# EAGLE board carret (EAGLE 5.11)
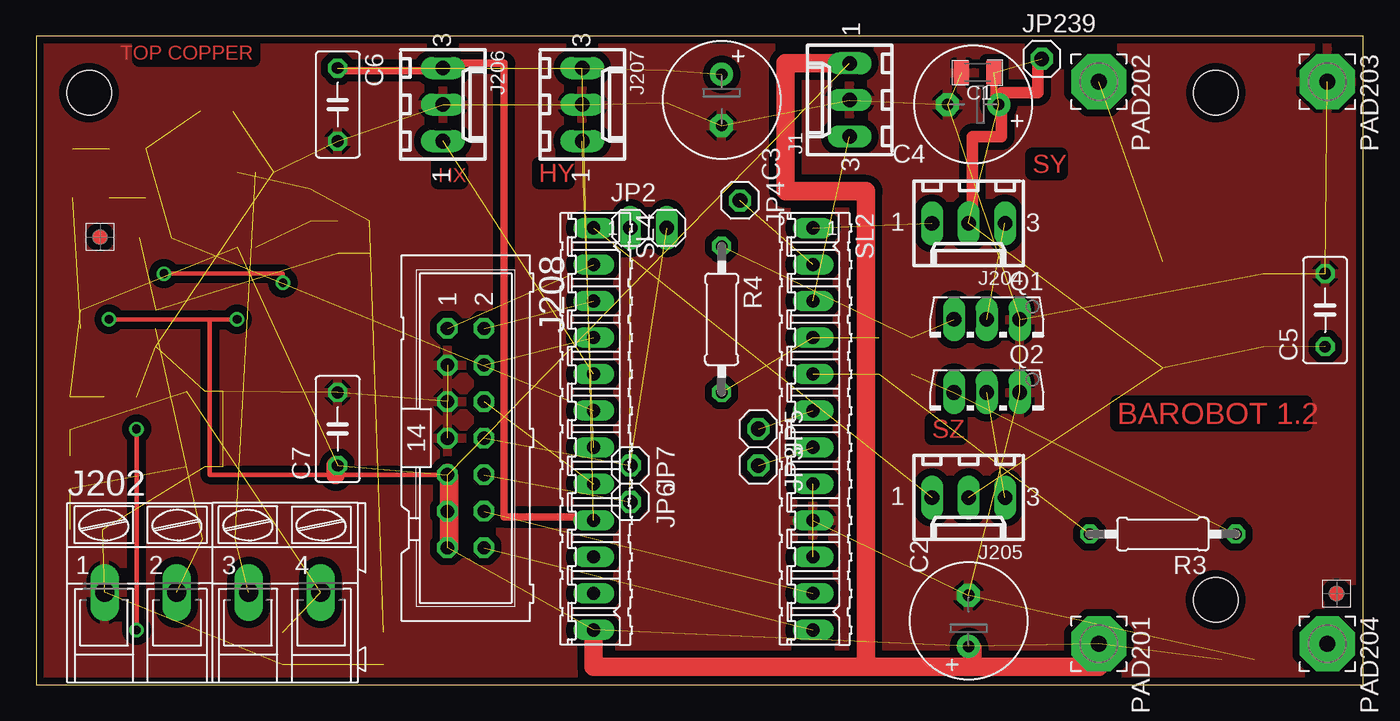
[diagram p0: board, top side]
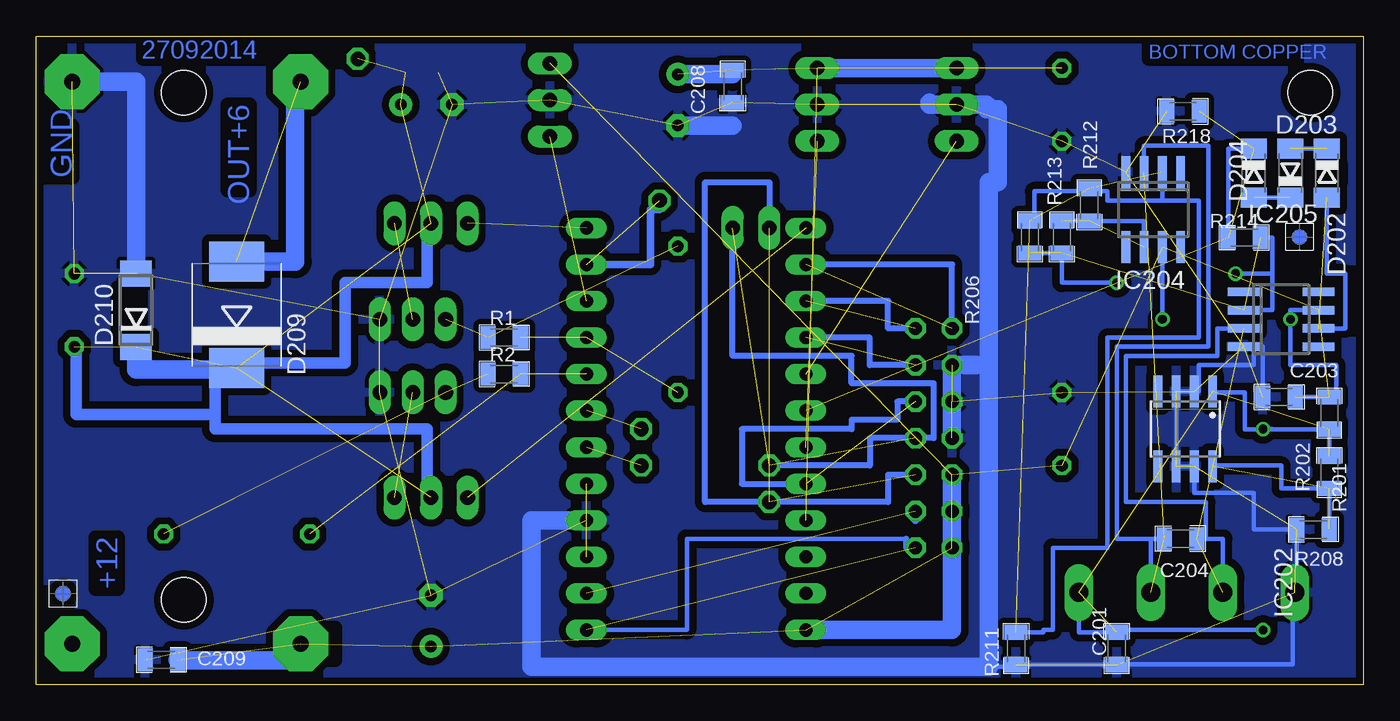
[diagram p1: board, bottom side, seen from below]

Size 92.2 x 45.09 mm. Coordinates in mm from the lower left corner, seen from the top.
Outline: 0,0 92.2,0 92.2,45.09 0,45.09 0,0
Copper layers (1*16): Top 0.035mm / dielectric 1.5mm / Bottom 0.035mm
Design rules "default *": minimum track width 10mil, minimum drill 0.5mm, track to track 10mil, track to pad 10mil, pad to pad 8mil, via to via 10mil, smd to smd 8mil, copper to edge 20mil, drill to drill 8mil, minimum pad ring 10mil, minimum via ring 8mil, stop-mask expansion 0mil, vias tented up to drill 0mil, thermal gap 10mil
Net classes: 0 default: width 0.381 mm, drill 0.254 mm, clearance 0.254 mm; 1 power12: width 1.27 mm; 2 ground: width 0.508 mm; 3 power5: width 0.508 mm; 4 power6: width 0.813 mm
Holes 3.1 mm at 81.93,5.91 81.95,41.15 3.68,41.15
bRestrict: area 84.9,24.8 to 86.5,27.6; area 1.6,34.9 to 8.6,36.2; area 71.4,1.7 to 71.6,4

## Footprints (pad centres in the part's own frame; a part is rotated, then mirrored left to right if it is on the bottom)
0805 = smd 1.044 x 1.6: 1 -1.127,0; 2 1.127,0
E3,5-8 = drill 0.813 pad 1.6 round: + -1.778,0 | drill 0.813 pad 1.6 octagon: - 1.778,0
C050-030X075 = drill 0.813 octagon: 1 -2.54,0; 2 2.54,0
SOD80C = smd 1.4 x 1.8: A 1.7,0; C -1.7,0
SMC = smd 2.8 x 3.8: A 3.7,0; C -3.7,0
DO214AA = smd 1.8 x 2.2: A 2.55,0; C -2.55,0
SO08 = smd 0.6 x 2.2: 1 -1.905,-2.6; 2 -0.635,-2.6; 3 0.635,-2.6; 4 1.905,-2.6; 5 1.905,2.6; 6 0.635,2.6; 7 -0.635,2.6; 8 -1.905,2.6
6410-03 = drill 1.016 long: 1 2.54,0; 2 0,0; 3 -2.54,0
AK300/4 = drill 1.321 long: 1 -7.493,0; 2 -2.515,0; 3 2.515,0; 4 7.493,0
ML14 = drill 0.914 octagon: 1 -7.62,-1.27; 2 -7.62,1.27; 3 -5.08,-1.27; 4 -5.08,1.27; 5 -2.54,-1.27; 6 -2.54,1.27; 7 0,-1.27; 8 0,1.27; 9 2.54,-1.27; 10 2.54,1.27; 11 5.08,-1.27; 12 5.08,1.27; 13 7.62,-1.27; 14 7.62,1.27
1X02 = drill 1.016 long: 1 -1.27,0; 2 1.27,0
1X01 = drill 1.016 octagon: 1 0,0
3,81/1,1 = drill 1.118 pad 3.81 octagon: 1 0,0
TO126AV = drill 1.016 long: B 2.286,-1.27; C 0,-1.27; E -2.286,-1.27
0207/10 = drill 0.813 octagon: 1 -5.08,0; 2 5.08,0
12P = drill 0.914 long: 1 -13.97,0; 2 -11.43,0; 3 -8.89,0; 4 -6.35,0; 5 -3.81,0; 6 -1.27,0; 7 1.27,0; 8 3.81,0; 9 6.35,0; 10 8.89,0; 11 11.43,0; 12 13.97,0

## Placement (x,y rotation side)
C1  100n  [0805]  65.41,42.55 180 top
C2  100uF  [E3,5-8]  64.77,4.45 90 top
C3  100uF  [E3,5-8]  47.62,40.64 270 top
C4  100uF  [E3,5-8]  65.09,40.32 180 top
C5  100n  [C050-030X075]  89.53,26.04 90 top
C6  100n  [C050-030X075]  20.95,40.32 270 top
C7  100n  [C050-030X075]  20.95,17.78 90 top
C201  100n  [0805]  17.14,2.54 90 bottom
C203  100n  [0805]  5.87,20 0 bottom
C204  100n  [0805]  12.7,10.16 180 bottom
C208  100n  [0805]  43.81,41.59 270 bottom
C209  100n  [0805]  83.5,1.75 0 bottom
D202  1N4148  [SOD80C]  2.54,35.56 270 bottom
D203  1N4148  [SOD80C]  5.08,35.56 90 bottom
D204  1N4148  [SOD80C]  7.62,35.56 270 bottom
D209  SK36  [SMC]  78.26,25.72 90 bottom
D210  SS20  [DO214AA]  85.25,26.04 90 bottom
IC202  TL431  [SO08]  12.38,17.78 180 bottom
IC204  OP07  [SO08]  14.61,33.02 180 bottom
IC205  OP07  [SO08]  5.71,25.4 270 bottom
J1  WF03S-LF  [6410-03]  56.52,40.64 90 top
J202  [AK300/4]  12.27,6.42 0 top
J204  WF03S-LF  [6410-03]  64.77,32.07 180 top
J205  WF03S-LF  [6410-03]  64.77,13.02 180 top
J206  WF03S-LF  [6410-03]  28.26,40.32 270 top
J207  WF03S-LF  [6410-03]  37.94,40.32 270 top
J208  BH14S  [ML14]  29.84,17.14 270 top
JP2  [1X02]  42.55,31.75 0 top
JP3  [1X01]  50.16,15.24 270 top
JP4  [1X01]  48.9,33.66 270 top
JP5  [1X01]  50.16,17.78 270 top
JP6  [1X01]  41.27,12.7 270 top
JP7  [1X01]  41.27,15.24 270 top
JP239  [1X01]  69.85,43.5 0 top
PAD201  [3,81/1,1]  73.82,2.86 270 top
PAD202  [3,81/1,1]  73.82,41.91 270 top
PAD203  [3,81/1,1]  89.69,41.91 270 top
PAD204  [3,81/1,1]  89.69,2.86 270 top
Q1  BD679  [TO126AV]  66.04,24.13 180 top
Q2  BD679  [TO126AV]  66.04,19.05 180 top
R1  1k  [0805]  59.69,24.13 0 bottom
R2  1k  [0805]  59.69,21.59 0 bottom
R3  1k  [0207/10]  78.26,10.48 180 top
R4  1k  [0207/10]  47.62,25.4 270 top
R201  82R  [0805]  2.38,18.89 90 bottom
R202  3k 1%  [0805]  2.38,14.76 90 bottom
R206  8k2  [0805]  23.18,31.11 270 bottom
R208  1k 1%  [0805]  3.49,10.79 0 bottom
R211  330k 1%  [0805]  24.13,2.54 90 bottom
R212  1k 1%  [0805]  19.05,33.34 270 bottom
R213  1k 1%  [0805]  20.95,31.11 270 bottom
R214  330k 1%  [0805]  8.28,31.08 180 bottom
R218  470R  [0805]  12.54,39.85 180 bottom
SL2  [12P]  53.98,17.78 270 top
SL4  [12P]  38.73,17.78 270 top
U$1  [FIDUCIAL_G10S]  4.45,31.11 0 top
U$2  [FIDUCIAL_G10S]  90.33,6.35 0 top
U$3  [FIDUCIAL_G10S]  90.33,6.35 0 bottom
U$4  [FIDUCIAL_G10S]  4.45,31.11 0 bottom

## Library data of the parts
C1 C201 C203 C204 C208 C209 R1 R2 R202 R206 R208 R211-R214 R218 = barobot
C2-C4 R3 R4 = rcl
C5-C7 = resistor
D202-D204 D209 D210 = diode
IC202 = 0alib
IC204 IC205 = linear
J1 J204-J207 = con-molex; OC_FARNELL: unknown; OC_NEWARK: unknown
J202 = con-ptr500
J208 = con-ml
JP2-JP7 JP239 = pinhead
PAD201-PAD204 = wirepad
Q1 Q2 = transistor-power
R201 = barobot; A: a
SL2 SL4 = con-amp-quick; OC_FARNELL: unknown; OC_NEWARK: unknown
U$1-U$4 = dicons

## Nets
+10V: C201.2 IC202.1 J202.4 R201.1 R202.2
+12V [power12]: C2.+ C7.1 C203.2 C209.2 IC204.7 IC205.7 J1.1 J208.9 J208.11 J208.13 PAD201.1 R201.2 SL4.12
GND [ground]: C1.2 C2.- C3.- C4.- C5.2 C6.2 C7.2 C201.1 C203.1 C208.2 C209.1 D210.A IC202.2 IC202.3 IC202.6 IC202.7 IC204.4 IC205.4 J1.2 J202.1 J206.2 J207.2 J208.3 J208.5 J208.7 PAD203.1 Q1.E Q2.E R208.1 R211.1 R218.2 SL2.9
N$1: Q1.B R1.1 R4.1
N$2: J208.14 SL2.12
N$3: J1.3 SL2.3
N$4: JP4.1 SL2.2
N$5: J206.1 SL4.5
N$6: J208.1 SL4.2
N$7: J208.12 SL2.11
N$8: J208.2 SL4.3
N$9: J208.10 JP2.1 JP6.1
N$10: J205.1 SL4.1
N$11: J208.8 JP2.2 JP7.1
N$12: J208.4 SL4.4
N$13: IC205.2 R206.2 R213.2 R214.1
N$14 [power12]: D209.A PAD202.1
N$15: SL2.8 SL2.10
N$16: J208.6 SL4.8
N$17: J204.3 Q1.C
N$18: R1.2 R4.2 SL2.4
N$19: R2.2 R3.2 SL2.5
N$20: J205.3 Q2.C
N$21: J204.1 SL2.1
N$22 [power6]: C1.1 C4.+ C5.1 D209.C D210.C J204.2 J205.2 JP239.1
N$23: Q2.B R2.1 R3.1
N$24: JP5.1 SL2.6
N$25: JP3.1 SL2.7
N$26: J207.1 SL4.7
N$41: D204.C R214.2 R218.1 SL4.6
N$43: IC202.8 R202.1 R208.2
N$49: C204.2 IC204.3 J202.3
N$50: C204.1 IC205.3 J202.2
N$51: IC204.2 R206.1 R211.2 R212.1
N$52: IC204.6 R212.2 R213.1
N$54: D202.A IC205.6
N$55: D202.C D203.A
N$56: D203.C D204.A
VCC [power5]: C3.+ C6.1 C208.1 J206.3 J207.3 SL4.9

## Tracks (layer width: path | path; a pad name or v marks a point on that pad's centre or on a via)
+10V  (via drill 0.6 pad 0.6)  (4 unrouted)
  Top 0.305: v6.99,3.81 v6.99,17.78
  Bottom 0.305: C201.2 19.76,3.67 J202.4 | R202.2 | R202.2 R201.1 6.35,17.76 | 6.35,17.76 8.26,17.76 8.26,20.32 10.48,20.32 IC202.1 | v6.99,17.78 6.35,17.78 6.35,17.76 | v6.99,3.81 17.14,3.81
  Bottom 0.508: 17.14,3.81 C201.2
+12V  (via drill 0.6 pad 0.6)  (12 unrouted)
  Top 0.305: v5.08,25.4 12.06,25.4 | 12.06,25.4 v13.97,25.4 | J208.9 20.83,14.61 12.06,14.61 12.06,25.4
  Top 1.27: SL4.12 38.73,1.27 57.66,1.27 | 57.66,1.27 65.02,1.27 | 65.02,1.27 73.82,1.27 PAD201.1 | J1.1 52.07,43.18 52.07,34.29 57.66,34.29 57.66,1.27 | 28.57,14.73 J208.9 28.57,14.48 28.7,14.48 28.7,12.06 J208.11 28.57,11.94 28.7,11.94 28.7,9.53 J208.13 28.57,9.65 | C2.+ 64.77,2.54 65.02,2.54 65.02,1.27 | C7.1 20.83,15.24 20.83,14.61
  Bottom 0.305: C203.2 4.75,20.02 R201.2 1.91,20.02 1.91,22.23 5.08,22.23 v5.08,25.4 5.08,26.04 IC205.7 | v13.97,25.4 IC204.7
  Bottom 1.27: J208.13 28.57,9.4 | 38.35,3.81 SL4.12 28.57,3.81 J208.13 | C209.2 82.33,1.75 82.33,1.71 73.82,1.71 PAD201.1 73.69,2.86 73.69,2.48 | J208.9 J208.13
GND  (31 unrouted)
  Bottom 0.305: C203.1 6.99,20 6.99,23.5 7.62,23.5 | 26.04,1.27 24.13,1.27 R211.1 C201.1 17.14,1.43 4.92,1.43 4.92,6.42 J202.1 4.62,6.42 R208.1 7.62,10.79 7.62,13.34 11.75,13.34 IC202.7 IC202.6 IC202.3 IC202.2 11.43,20.38 11.43,22.23 7.62,22.23 7.62,23.5 | 7.62,23.5 IC205.4
  Bottom 1.27: SL2.9 57.78,11.43 57.78,1.27 26.04,1.27 26.04,22.23 | J208.7 J208.5 J208.3 26.04,22.23 | PAD203.1 85.25,41.91 D210.A | 30.16,40.47 30.16,40.32 J206.2 26.19,40.32 26.19,40.16 | 43.81,38.86 C3.- | 26.19,40.16 26.04,40.16 | 26.04,22.23 26.04,34.92 25.4,34.92 25.4,40.01 26.19,40.01 26.19,40.16
  pour Top (isolate 0.508, rank 3): 0,45.09 92.08,45.09 92.08,0 0,0
  pour Bottom (isolate 0.508): 0,45.09 92.08,45.09 92.2,0 0,0
N$1  (2 unrouted)
N$2  (1 unrouted)
  Bottom 0.305: 31.75,10.16 46.99,10.16 46.99,3.81 SL2.12
  Bottom 0.406: J208.14 31.75,9.53 31.75,10.16
N$3  (1 unrouted)
N$4  (1 unrouted)
  Bottom 0.508: JP4.1 48.9,33.02 49.53,33.02 49.53,29.21 SL2.2
N$5  (1 unrouted)
N$6  (1 unrouted)
  Bottom 0.406: SL4.2 28.57,29.21 J208.1
N$7  (1 unrouted)
  Bottom 0.508: J208.12 31.11,11.43
N$8  (1 unrouted)
  Bottom 0.406: J208.2 33.02,24.77 33.02,26.67 SL4.3
N$9  (2 unrouted)
  Bottom 0.406: J208.10 33.02,14.61 33.02,12.7 JP6.1 45.72,12.7 45.72,34.92 41.27,34.92 JP2.1
N$10  (1 unrouted)
N$11  (2 unrouted)
  Bottom 0.406: JP7.1 34.29,15.24 34.29,17.14 J208.8 29.84,17.14 29.84,20.95 35.56,20.95 35.56,22.86 43.81,22.86 JP2.2
N$12  (1 unrouted)
  Bottom 0.406: J208.4 34.29,22.23 34.29,24.13 SL4.4
N$13  (via drill 0.6 pad 0.6)  (3 unrouted)
  Top 0.305: v8.89,28.57 17.14,28.57 v17.14,27.94
  Bottom 0.305: R206.2 R213.2 20.95,27.94 v17.14,27.94 | IC205.2 6.35,26.04 6.35,28.57 | 6.35,28.57 v8.89,28.57 | R214.1 6.35,31.08 6.35,28.57
N$14  (1 unrouted)
  Bottom 1.27: D209.A 78.26,29.4 74.2,29.4 74.2,41.91 PAD202.1
N$15  (1 unrouted)
N$16  (1 unrouted)
  Bottom 0.406: J208.6 32.38,19.68 32.38,18.41 35.56,18.41 35.56,17.78 43.18,17.78 43.18,13.97 SL4.8
N$17  (1 unrouted)
N$18  (2 unrouted)
N$19  (2 unrouted)
N$20  (1 unrouted)
N$21  (1 unrouted)
N$22  (7 unrouted)
  Top 0.508: C1.1 66.53,42.16 66.55,42.16 66.55,40.32 C4.+
  Top 0.813: J204.2 65.02,32.07 65.02,38.1 67.06,38.1 67.06,40.13 66.86,40.13 C4.+ 67.06,40.32 67.06,41.15 69.6,41.15 69.6,43.69 69.85,43.69 JP239.1
  Bottom 0.813: 79.76,18.8 79.76,17.78 65.02,17.78 65.02,13.02 J205.2 | 79.76,18.8 79.76,21.34 78.26,21.34 D209.C 77.72,22.02 77.72,22.35 70.74,22.35 70.74,27.94 65.02,27.94 65.02,32 64.77,32 J204.2 | 79.76,18.8 89.41,18.8 89.41,23.37 89.53,23.37 C5.1
  Bottom 1.27: D210.C 85.25,21.91 78.26,21.91 D209.C
N$23  (2 unrouted)
N$24  (1 unrouted)
N$25  (1 unrouted)
N$26  (1 unrouted)
N$41  (3 unrouted)
  Bottom 0.305: D204.C 9.41,37.26 R214.2
N$43  (2 unrouted)
  Bottom 0.305: R208.2 2.38,10.79 R202.1 5.71,13.64 5.71,15.24 10.48,15.24 IC202.8
N$49  (2 unrouted)
  Bottom 0.305: 14.79,10.16 C204.2 | J202.3 14.79,10.16 | 14.79,10.16 17.14,10.16 17.14,23.5 10.79,23.5 10.79,37.47 15.24,37.47 IC204.3
N$50  (2 unrouted)
  Bottom 0.305: J202.2 9.76,10.16 10.94,10.16 | 10.94,10.16 C204.1 | 10.94,10.16 10.94,12.7 16.51,12.7 16.51,22.86 10.16,22.86 10.16,24.77 IC205.3
N$51  (3 unrouted)
  Bottom 0.305: R206.1 22.86,32.24 22.86,34.29 19.05,34.29 | 13.97,33.66 IC204.2 | R211.2 22.23,3.67 22.23,3.81 21.59,3.81 21.59,9.53 17.78,9.53 17.78,24.13 11.43,24.13 11.43,33.66 13.97,33.66 | 13.97,33.66 17.78,33.66 17.78,34.29 19.05,34.29 | 19.05,34.29 R212.1
N$52  (2 unrouted)
  Bottom 0.305: R213.1 19.05,32.24 R212.2 15.24,32.21 IC204.6
N$54  (1 unrouted)
  Bottom 0.305: IC205.6 1.27,24.77 1.27,28.57 2.54,28.57 D202.A
N$55  (1 unrouted)
  Bottom 0.305: D202.C D203.A
N$56  (1 unrouted)
  Bottom 0.305: D203.C D204.A
VCC  (5 unrouted)
  Top 0.508: SL4.9 38.73,11.68 32.51,11.68 32.51,43.18 28.26,43.18 J206.3 27.94,42.86 27.94,42.67 20.95,42.67 C6.1
  Bottom 0.508: J206.3 27.94,42.86 27.94,42.67
  Bottom 1.27: J206.3 J207.3 37.94,42.72 | 43.81,42.42 C3.+

## Text on the board
Top: TOP COPPER | SY | HX | HY | BAROBOT 1.2 | SZ
Bottom: 27092014 | BOTTOM COPPER | OUT+6 | GND | +12